# EAGLE board Devicedigitalout8 (EAGLE 5.00)
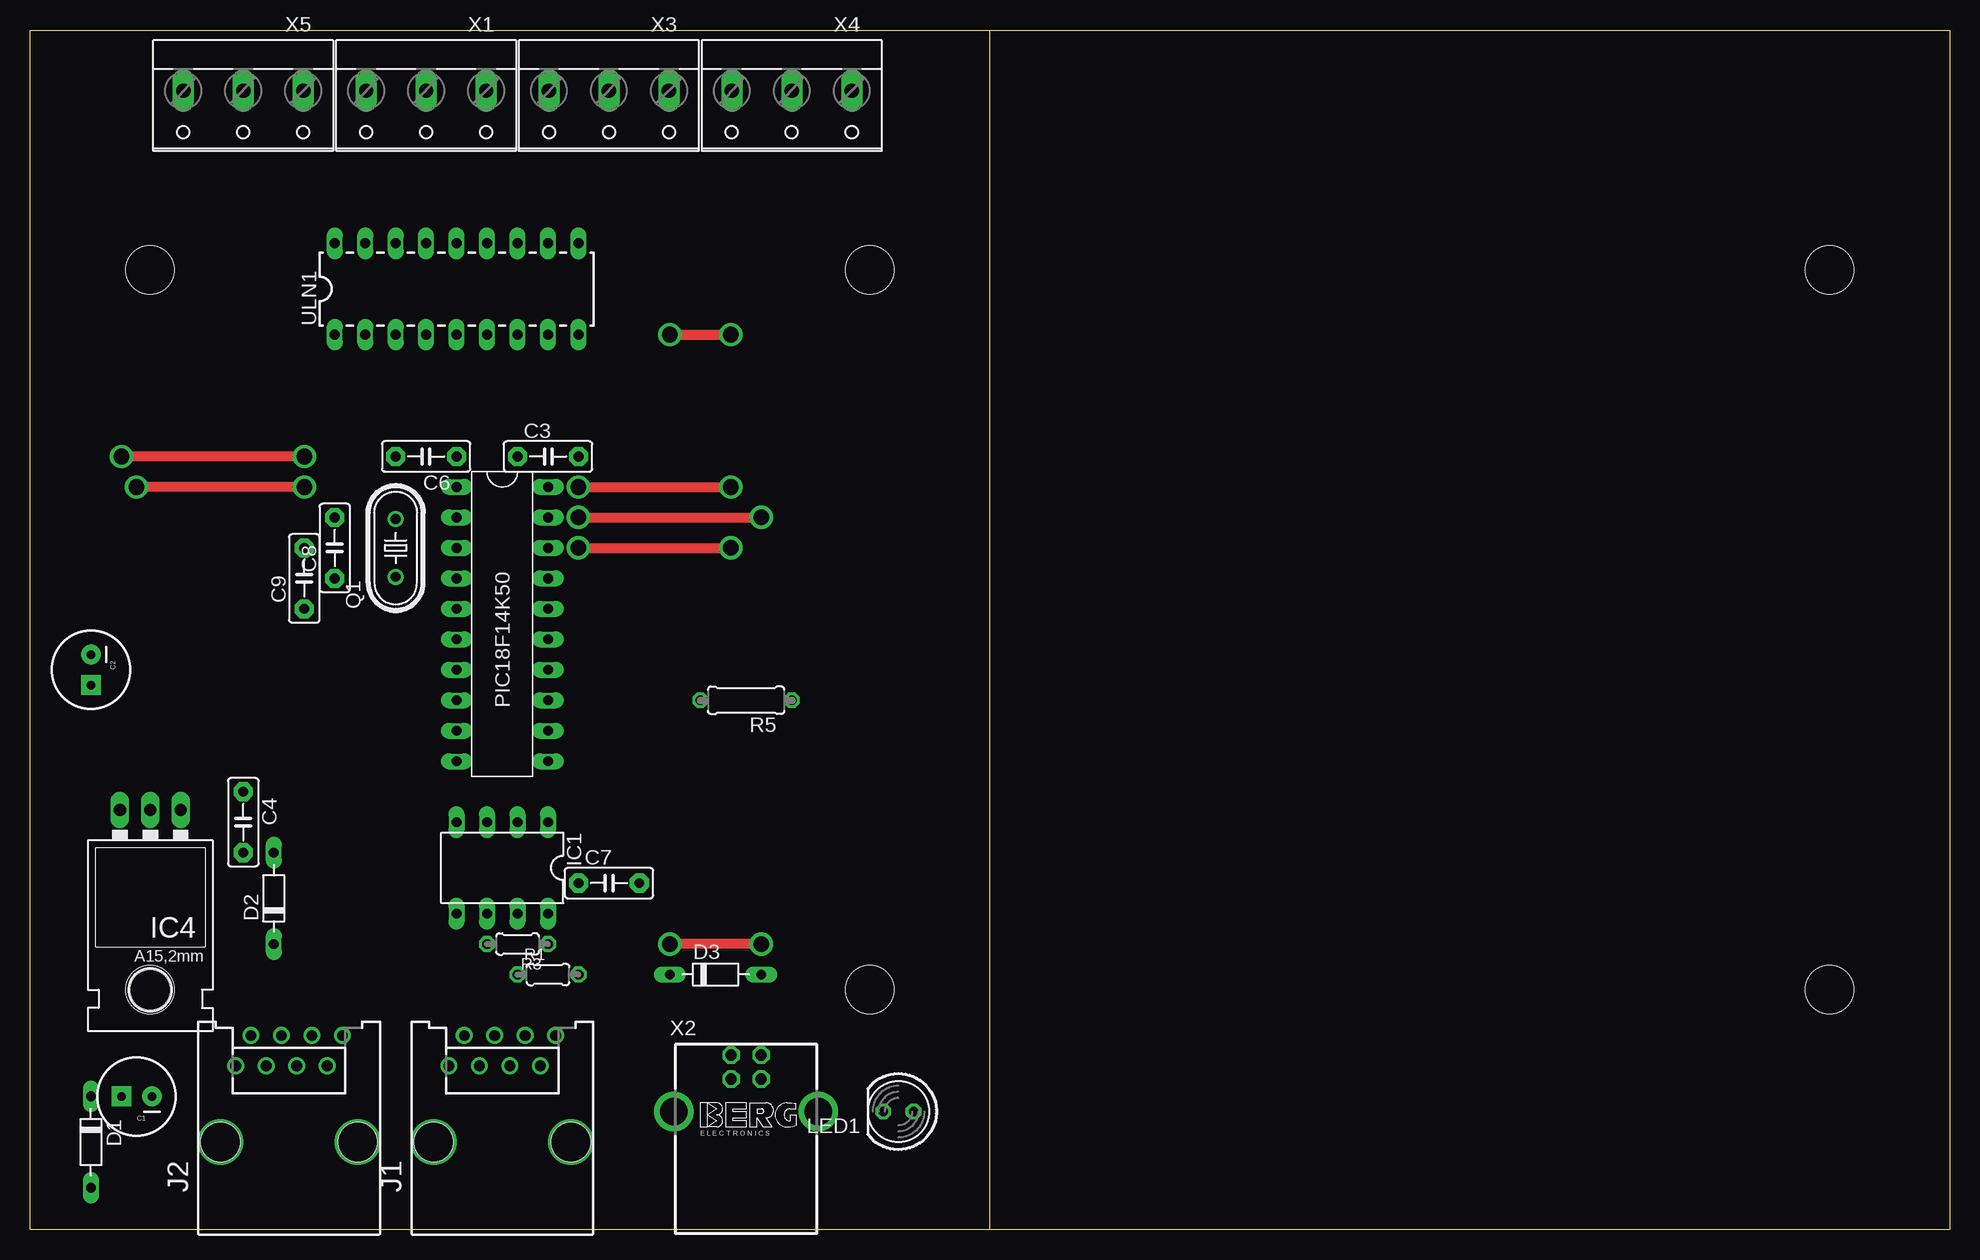
[diagram p0: board, top side]
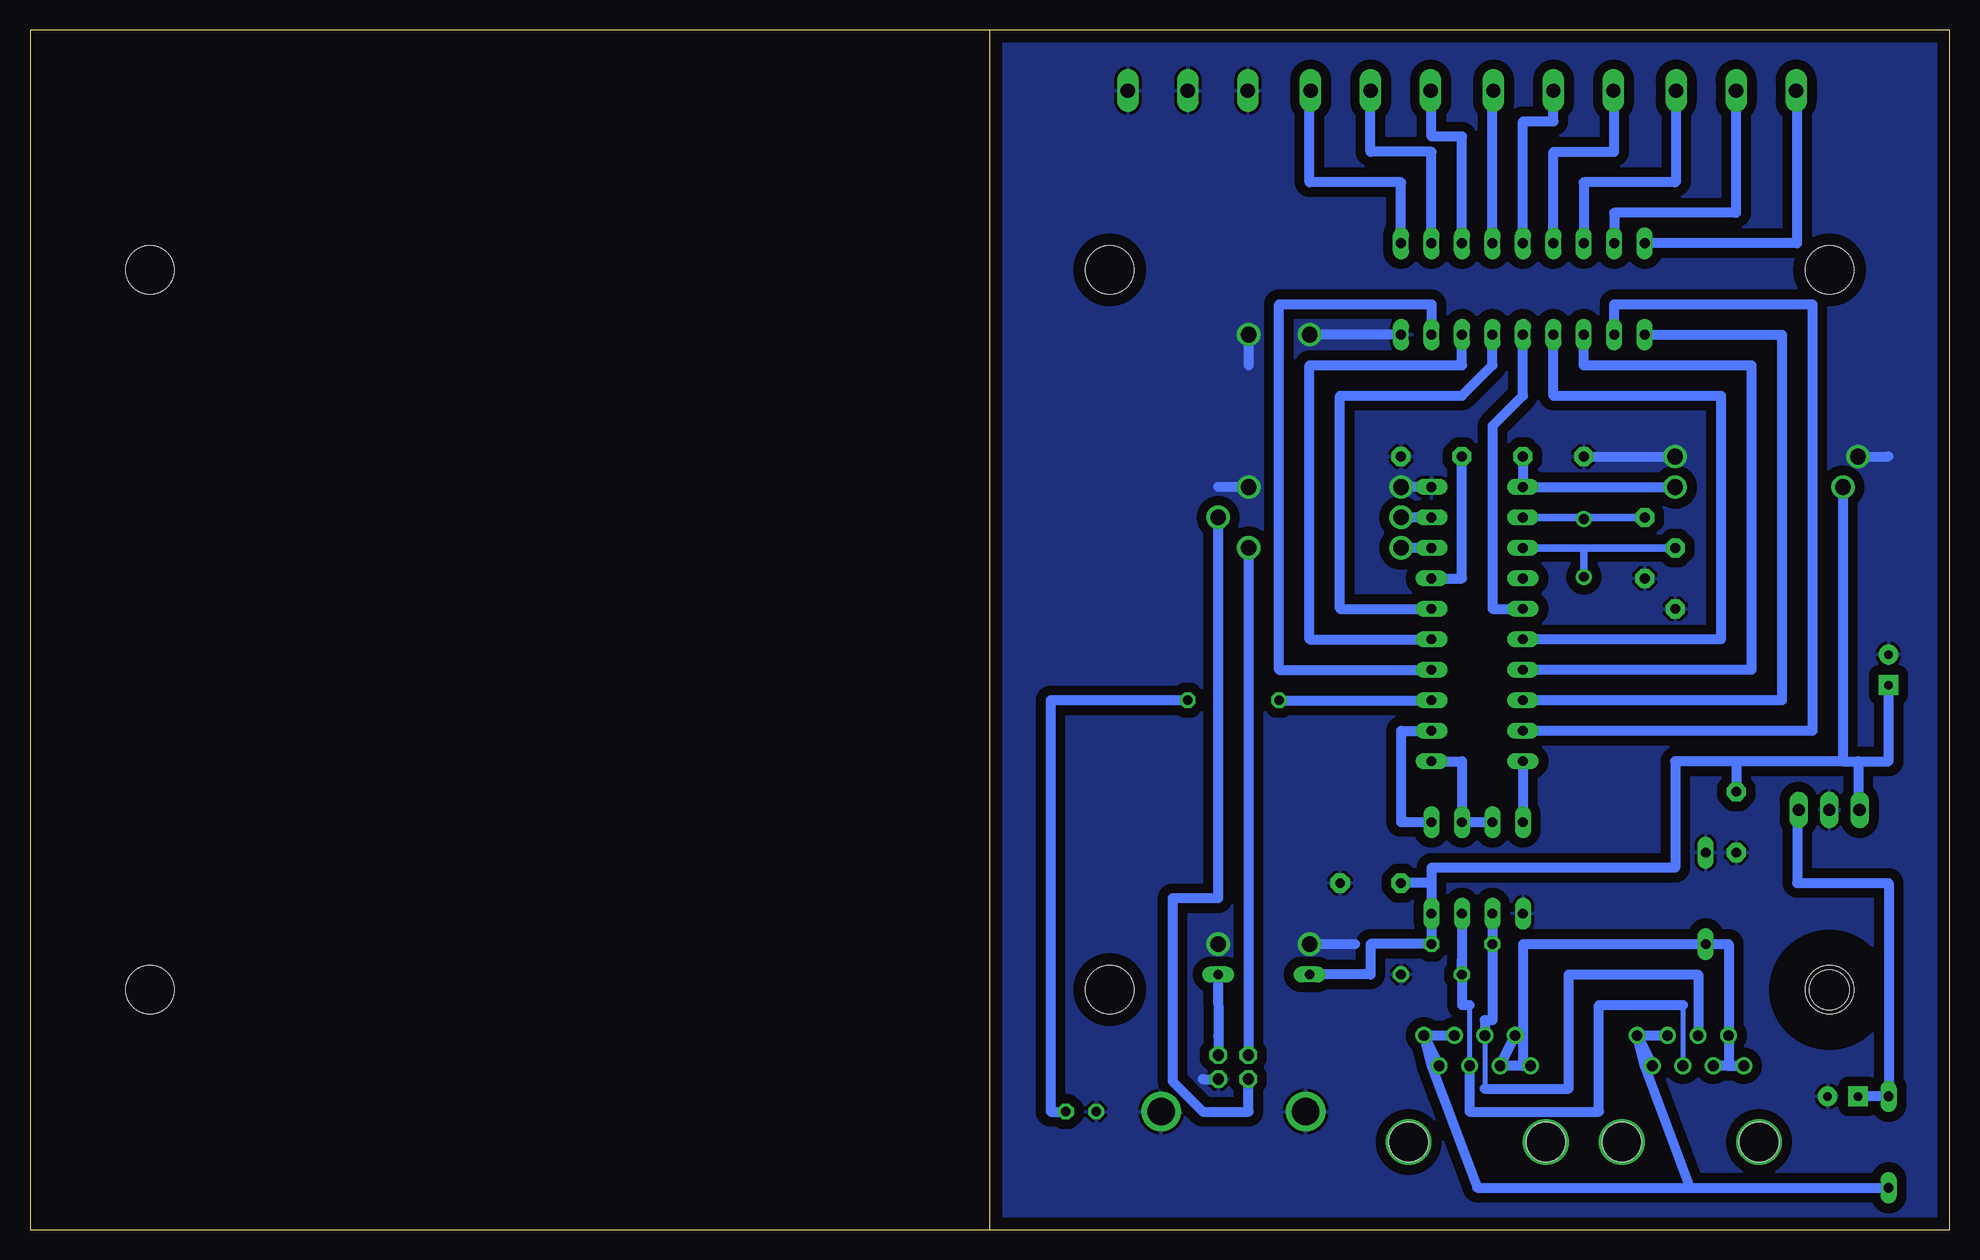
[diagram p1: board, bottom side, seen from below]

Size 160 x 100 mm. Coordinates in mm from the lower left corner, seen from the top.
Outline: 80,100 0,100 0,0 81.26,0
Outline: 80,100 160,100 160,0 81.26,0
Outline: 81.26,0 80,0 80,100
Copper layers (1*16): Top 0.035mm / dielectric 1.5mm / Bottom 0.035mm
Design rules "default": minimum track width 10mil, minimum drill 24mil, track to track 8mil, track to pad 8mil, pad to pad 8mil, via to via 8mil, smd to smd 8mil, copper to edge 40mil, drill to drill 8mil, minimum pad ring 10mil, minimum via ring 8mil, stop-mask expansion 4mil, vias tented up to drill 0mil, thermal gap 10mil
Holes 4 mm at 10,80 10,20 70,20 70,80 150,80 150,20

## Footprints (pad centres in the part's own frame; a part is rotated, then mirrored left to right if it is on the bottom)
CPOL-RADIAL-100UF-25V = drill 0.7 pad 1.651 square: 1 1.27,0 | drill 0.7 pad 1.651 round: 2 -1.27,0
C5B2.5 = drill 0.813 pad 1.6 octagon: 1 -2.54,0; 2 2.54,0
D-7.5 = drill 0.813 long: A 3.81,0; C -3.81,0
DIL08 = drill 0.813 long: 1 -3.81,-3.81; 2 -1.27,-3.81; 3 1.27,-3.81; 4 3.81,-3.81; 5 3.81,3.81; 6 1.27,3.81; 7 -1.27,3.81; 8 -3.81,3.81
78XXL = drill 1.016 long: GND 0,-3.81; IN -2.54,-3.81; OUT 2.54,-3.81 | hole 3.302: 0,11.176
215877-4 = drill 0.889 round: 1 -4.445,6.35; 2 -3.175,8.89; 3 -1.905,6.35; 4 -0.635,8.89; 5 0.635,6.35; 6 1.905,8.89; 7 3.175,6.35; 8 4.445,8.89 | hole 3.251: -5.715,0; 5.715,0
LED5MM = drill 0.813 octagon: A -1.27,0; K 1.27,0
HC49U-V = drill 0.813 round: 1 -2.413,0; 2 2.413,0
0204/5 = drill 0.813 octagon: 1 -2.54,0; 2 2.54,0
0207/7 = drill 0.813 octagon: 1 -3.81,0; 2 3.81,0
PIC18F14K50-E/P = drill 0.813 long: 1 -5.08,12.7; 2 -5.08,10.16; 3 -5.08,7.62; 4 -5.08,5.08; 5 -5.08,2.54; 6 -5.08,0; 7 -5.08,-2.54; 8 -5.08,-5.08; 9 -5.08,-7.62; 10 -5.08,-10.16; 11 2.54,-10.16; 12 2.54,-7.62; 13 2.54,-5.08; 14 2.54,-2.54; 15 2.54,0; 16 2.54,2.54; 17 2.54,5.08; 18 2.54,7.62; 19 2.54,10.16; 20 2.54,12.7
DIL18 = drill 0.813 long: 1 -10.16,-3.81; 2 -7.62,-3.81; 3 -5.08,-3.81; 4 -2.54,-3.81; 5 0,-3.81; 6 2.54,-3.81; 7 5.08,-3.81; 8 7.62,-3.81; 9 10.16,-3.81; 10 10.16,3.81; 11 7.62,3.81; 12 5.08,3.81; 13 2.54,3.81; 14 0,3.81; 15 -2.54,3.81; 16 -5.08,3.81; 17 -7.62,3.81; 18 -10.16,3.81
W237-103 = drill 1.194 long: 1 -5,-1.29; 2 0,-1.29; 3 5,-1.29
PN61729-S = drill 0.95 octagon: 1 1.25,4.71; 2 -1.25,4.71; 3 -1.25,2.71; 4 1.25,2.71 | drill 2.3 pad 2.9 round: S1 -6.02,0; S2 6.02,0

## Placement (x,y rotation side)
C1  470uf 25v  [CPOL-RADIAL-100UF-25V]  8.89,11.1 180 top
C2  10uf  [CPOL-RADIAL-100UF-25V]  5.08,46.66 270 top
C3  100nf  [C5B2.5]  43.18,64.44 0 top
C4  100nf  [C5B2.5]  17.78,33.96 270 top
C6  10nf  [C5B2.5]  33.02,64.44 180 top
C7  10nf  [C5B2.5]  48.26,28.88 0 top
C8  22pf  [C5B2.5]  25.4,56.82 90 top
C9  22pf  [C5B2.5]  22.86,54.28 90 top
D1  1N4007  [D-7.5]  5.08,7.29 270 top
D2  1N4007  [D-7.5]  20.32,27.61 90 top
D3  1N4007  [D-7.5]  57.15,21.26 0 top
IC1  LTC485N  [DIL08]  39.37,30.15 180 top
IC4  [78XXL]  10.03,31.17 180 top
J1  [215877-4]  39.37,7.29 0 top
J2  [215877-4]  21.59,7.29 0 top
LED1  Red  [LED5MM]  72.39,9.83 180 top
Q1  12mhz  [HC49U-V]  30.48,56.82 90 top
R1  10K  [0204/5]  43.18,21.26 0 top
R3  10K  [0204/5]  40.64,23.8 180 top
R5  470  [0207/7]  59.69,44.12 180 top
U$2  PIC18F14K50-E-P  [PIC18F14K50-E/P]  40.64,49.2 0 top
ULN1  [DIL18]  35.56,78.41 0 top
X1  [W237-103]  33.02,93.65 180 top
X2  PN61729-S  [PN61729-S]  59.69,9.83 0 top
X3  [W237-103]  48.26,93.65 180 top
X4  [W237-103]  63.5,93.65 180 top
X5  [W237-103]  17.78,93.65 180 top

## Library data of the parts
C1 C2 ULN1 = SparkFun
C3 C4 C6-C9 = capacitor-wima
D1-D3 = diode
IC1 = linear-technology
IC4 = v-reg
J1 J2 = con-amp
LED1 = led
Q1 = crystal
R1 R3 = resistor
R5 = rcl
U$2 = pic18f14k50
X1 X3-X5 = con-wago-500
X2 = con-berg

## Nets
5V: C2.1 C4.1 C6.1 C7.1 D3.C IC1.8 IC4.OUT R3.1 U$2.1
GND: C1.2 C2.2 C3.2 C4.2 C6.2 C7.2 C8.1 C9.1 D2.A IC1.5 IC4.GND LED1.K R1.2 U$2.20 ULN1.9 X2.4 X2.S1 X2.S2 X4.1 X4.2 X4.3
N$1: LED1.A R5.1
N$2: D1.A J1.6 J1.7 J1.8 J2.6 J2.7 J2.8
N$3: IC1.6 J1.4 J2.4 R3.2
N$4: R5.2 U$2.13
N$5: C1.1 D1.C IC4.IN
N$9: D2.C J1.1 J1.2 J1.3 J2.1 J2.2 J2.3
N$11: C3.1 U$2.17
N$12: ULN1.18 X5.3
N$13: U$2.19 X2.3
N$14: U$2.18 X2.2
N$15: D3.A X2.1
N$16: ULN1.17 X5.2
N$17: ULN1.16 X5.1
N$18: ULN1.15 X1.3
N$19: ULN1.14 X1.2
N$20: ULN1.13 X1.1
N$21: ULN1.12 X3.3
N$22: ULN1.11 X3.2
N$23: ULN1.10 X3.1
N$50: IC1.7 J1.5 J2.5 R1.1
N$52: C8.2 Q1.2 U$2.2
N$53: C9.2 Q1.1 U$2.3
RC0: U$2.16 ULN1.6
RC1: U$2.15 ULN1.7
RC2: U$2.14 ULN1.8
RC3: U$2.7 ULN1.3
RC4: U$2.6 ULN1.4
RC5: U$2.5 ULN1.5
RC6: U$2.8 ULN1.1
RC7: U$2.9 ULN1.2
UART_DIR: IC1.2 IC1.3 U$2.11
UART_RX: IC1.1 U$2.12
UART_TX: IC1.4 U$2.10

## Tracks (layer width: path | path; a pad name or v marks a point on that pad's centre or on a via)
5V  (via drill 1.3)
  Top 0.813: v22.86,61.9 v8.89,61.9
  Bottom 0.813: 17.78,39.04 22.86,39.04 22.86,30.15 43.18,30.15 43.18,28.88 | 43.18,28.88 IC1.8 | 43.18,28.88 R3.1 48.26,23.8 48.26,21.26 D3.C | 8.89,39.04 8.89,60.63 v8.89,61.9 | 17.78,39.04 C4.1 | IC4.OUT 7.62,34.98 7.62,39.04 8.89,39.04 | 8.89,39.04 5.08,39.04 C2.1 | C6.1 U$2.1 v22.86,61.9 | 43.18,28.88 C7.1 | 8.89,39.04 17.78,39.04
GND  (via drill 1.3)
  Top 0.813: v60.96,23.8 v53.34,23.8 | v45.72,61.9 v58.42,61.9 | v53.34,74.6 v58.42,74.6 | v22.86,64.44 v7.62,64.44
  Bottom 0.813: 62.23,12.54 X2.4 | v53.34,23.8 49.53,23.8 | U$2.20 v45.72,61.9 | v58.42,61.9 60.96,61.9 | ULN1.9 v53.34,74.6 | v58.42,74.6 58.42,72.06 | C6.2 v22.86,64.44 | v7.62,64.44 5.08,64.44
  pour Bottom (isolate 0.813): 0,-1.6 80.01,-1.6 80.01,101.27 0,101.27
N$1
  Bottom 0.813: R5.1 74.93,44.12 74.93,9.83 LED1.A
N$2
  Bottom 0.813: J1.8 J1.7 | J1.8 J1.6 | J2.8 J2.6 | J2.8 J2.7 | 21.59,3.48 D1.A | 21.59,3.48 39.37,3.48 43.18,13.64 J1.8 | 21.59,3.48 25.4,13.64 J2.8
N$3
  Bottom 0.406: J1.4 38.73,11.73
  Bottom 0.813: 38.73,11.73 31.75,11.73 31.75,21.26 20.95,21.26 J2.4 | J1.4 38.73,17.45 38.1,17.45 R3.2 IC1.6
N$4
  Bottom 0.813: R5.2 U$2.13
N$5
  Bottom 0.813: C1.1 D1.C 5.08,28.88 12.7,28.88 12.7,34.98 IC4.IN
N$6  (via drill 2.8)
  other vias: 45.09,7.29
N$7  (via drill 2.8)
  other vias: 33.66,7.29
N$8  (via drill 2.8)
  other vias: 27.3,7.29
N$9
  Bottom 0.813: 18.41,13.64 J2.2 18.41,23.8 D2.C 35.56,23.8 35.56,13.64 J1.1 J1.3 J1.2 | 18.41,13.64 J2.1 | 18.41,13.64 J2.3
N$10  (via drill 2.8)
  other vias: 15.88,7.29
N$11
  Bottom 0.813: U$2.17 40.64,54.28 C3.1
N$12
  Bottom 0.813: ULN1.18 12.7,82.22 12.7,94.92 12.72,94.94 X5.3
N$13  (via drill 1.3)
  Top 0.813: v45.72,59.36 v60.96,59.36
  Bottom 0.406: 58.42,12.37 X2.3
  Bottom 0.813: 58.42,12.37 58.42,9.83 62.23,9.83 64.77,12.37 64.77,27.61 60.96,27.61 60.96,56.82 v60.96,59.36 | U$2.19 v45.72,59.36
N$14  (via drill 1.3)
  Top 0.813: v45.72,56.82 v58.42,56.82
  Bottom 0.406: 58.42,14.91 X2.2
  Bottom 0.813: 58.42,14.91 58.42,53.01 v58.42,56.82 | U$2.18 v45.72,56.82
N$15
  Bottom 0.813: X2.1 60.94,16.16 D3.A
N$16
  Bottom 0.813: ULN1.17 27.94,84.76 17.78,84.76 X5.2
N$17
  Bottom 0.813: X5.1 22.78,87.38 22.86,87.3 30.48,87.3 ULN1.16
N$18
  Bottom 0.813: ULN1.15 33.02,89.84 27.94,89.84 27.94,94.92 27.96,94.94 X1.3
N$19
  Bottom 0.813: ULN1.14 35.56,92.38 33.02,92.38 X1.2
N$20
  Bottom 0.813: X1.1 38.08,94.94 38.1,94.92 ULN1.13
N$21
  Bottom 0.813: ULN1.12 40.64,91.11 43.18,91.11 43.18,94.92 43.2,94.94 X3.3
N$22
  Bottom 0.813: ULN1.11 43.18,89.84 48.26,89.84 X3.2
N$23
  Bottom 0.813: ULN1.10 45.72,87.3 53.34,87.3 53.34,94.92 53.32,94.94 X3.1
N$50
  Bottom 0.406: 40.01,18.72 J1.5 | 22.23,18.72 J2.5
  Bottom 0.813: R1.1 40.64,18.72 40.01,18.72 | J1.5 40.01,9.83 29.21,9.83 29.21,18.72 22.23,18.72 | IC1.7 R1.1 | R1.1 40.64,22.53
N$52
  Bottom 0.61: U$2.2 30.48,59.36 | 30.48,59.36 Q1.2 | 30.48,59.36 C8.2
N$53
  Bottom 0.61: U$2.3 30.48,56.82 | 30.48,56.82 Q1.1 | 30.48,56.82 C9.2
RC0
  Bottom 0.813: U$2.16 50.8,51.74 50.8,69.52 40.64,69.52 38.1,72.06 ULN1.6
RC1
  Bottom 0.813: U$2.15 53.34,49.2 53.34,72.06 40.64,72.06 ULN1.7
RC2
  Bottom 0.813: U$2.14 55.88,46.66 55.88,77.14 43.18,77.14 ULN1.8
RC3
  Bottom 0.813: U$2.7 16.51,46.66 16.51,72.06 30.48,72.06 ULN1.3
RC4
  Bottom 0.813: U$2.6 19.05,49.2 19.05,69.52 33.02,69.52 ULN1.4
RC5
  Bottom 0.813: U$2.5 38.1,51.74 38.1,66.98 35.56,69.52 ULN1.5
RC6
  Bottom 0.813: U$2.8 13.97,44.12 13.97,74.6 ULN1.1
RC7
  Bottom 0.813: U$2.9 11.43,41.58 11.43,77.14 27.94,77.14 ULN1.2
UART_DIR
  Bottom 0.813: U$2.11 40.64,39.04 IC1.2 IC1.3
UART_RX
  Bottom 0.813: IC1.1 45.72,33.96 45.72,41.58 U$2.12
UART_TX
  Bottom 0.813: U$2.10 IC1.4